# Altium PCB PCB1.PcbDoc
Units mm, origin at the board's own origin, x right, y up, seen from the top; angles counter-clockwise.
Board outline 102 x 101.6 mm, 2 copper layers (Top Layer, Bottom Layer); 110 components, 14 nets, 294 pads, 0 vias.
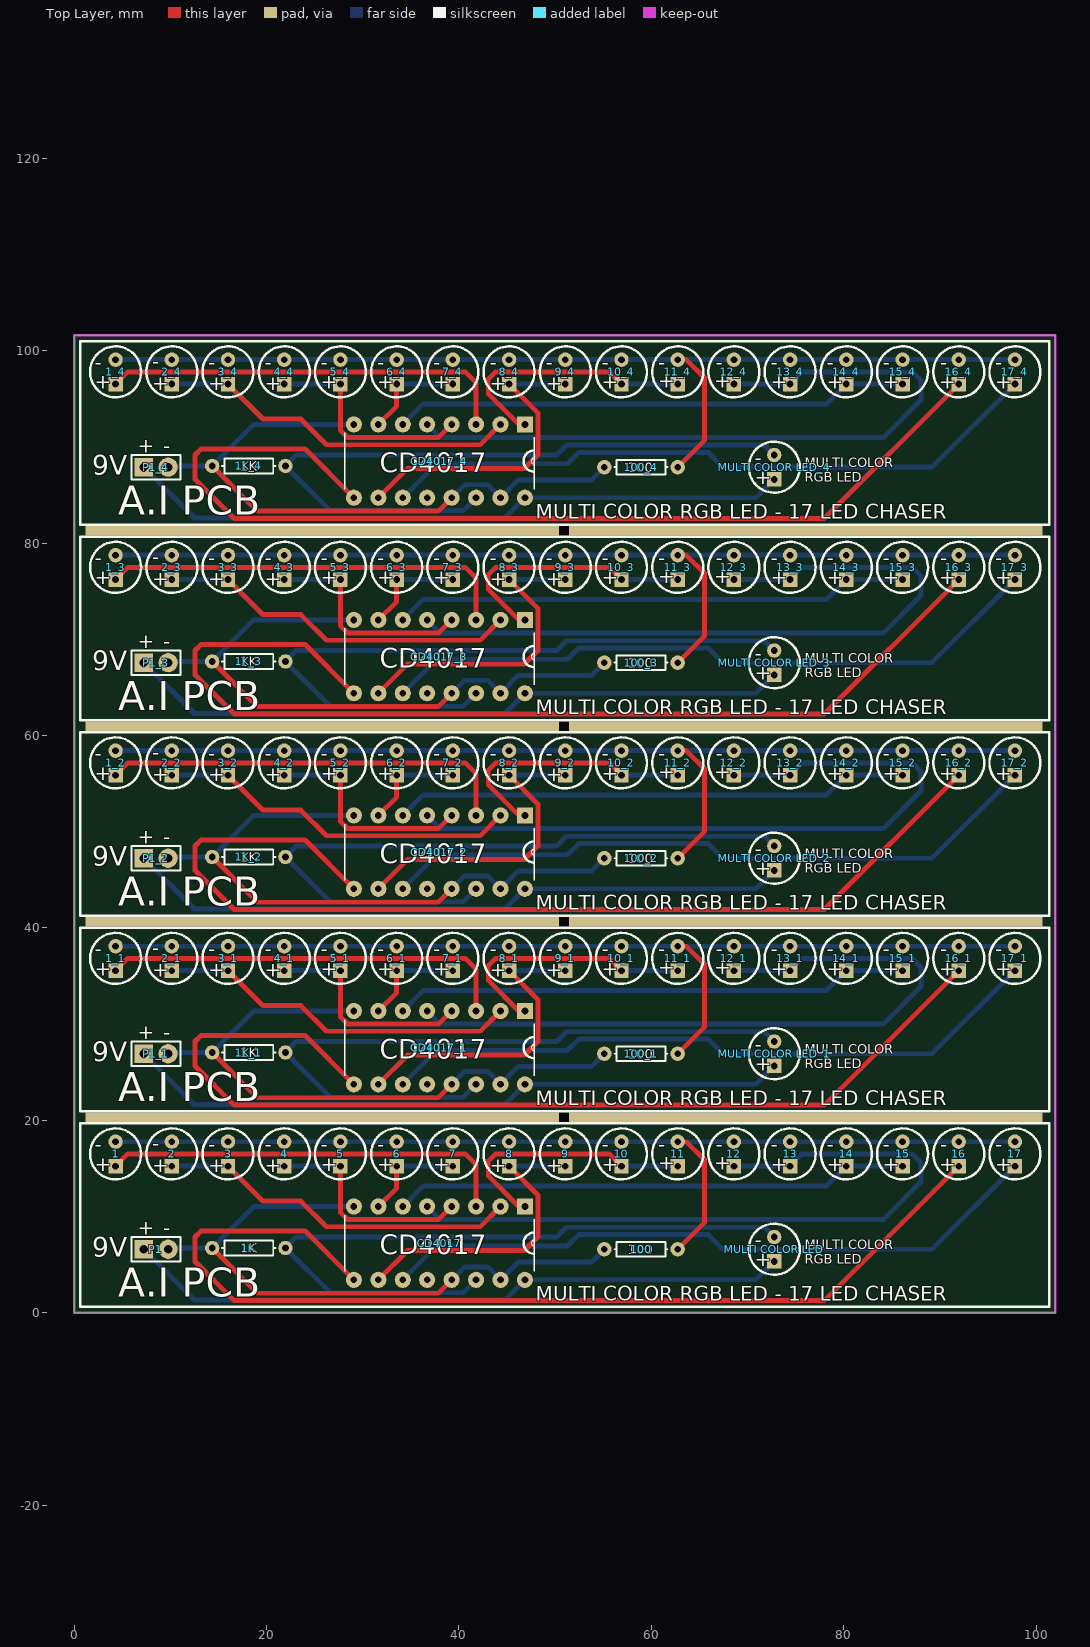
[diagram p0: Top Layer view]
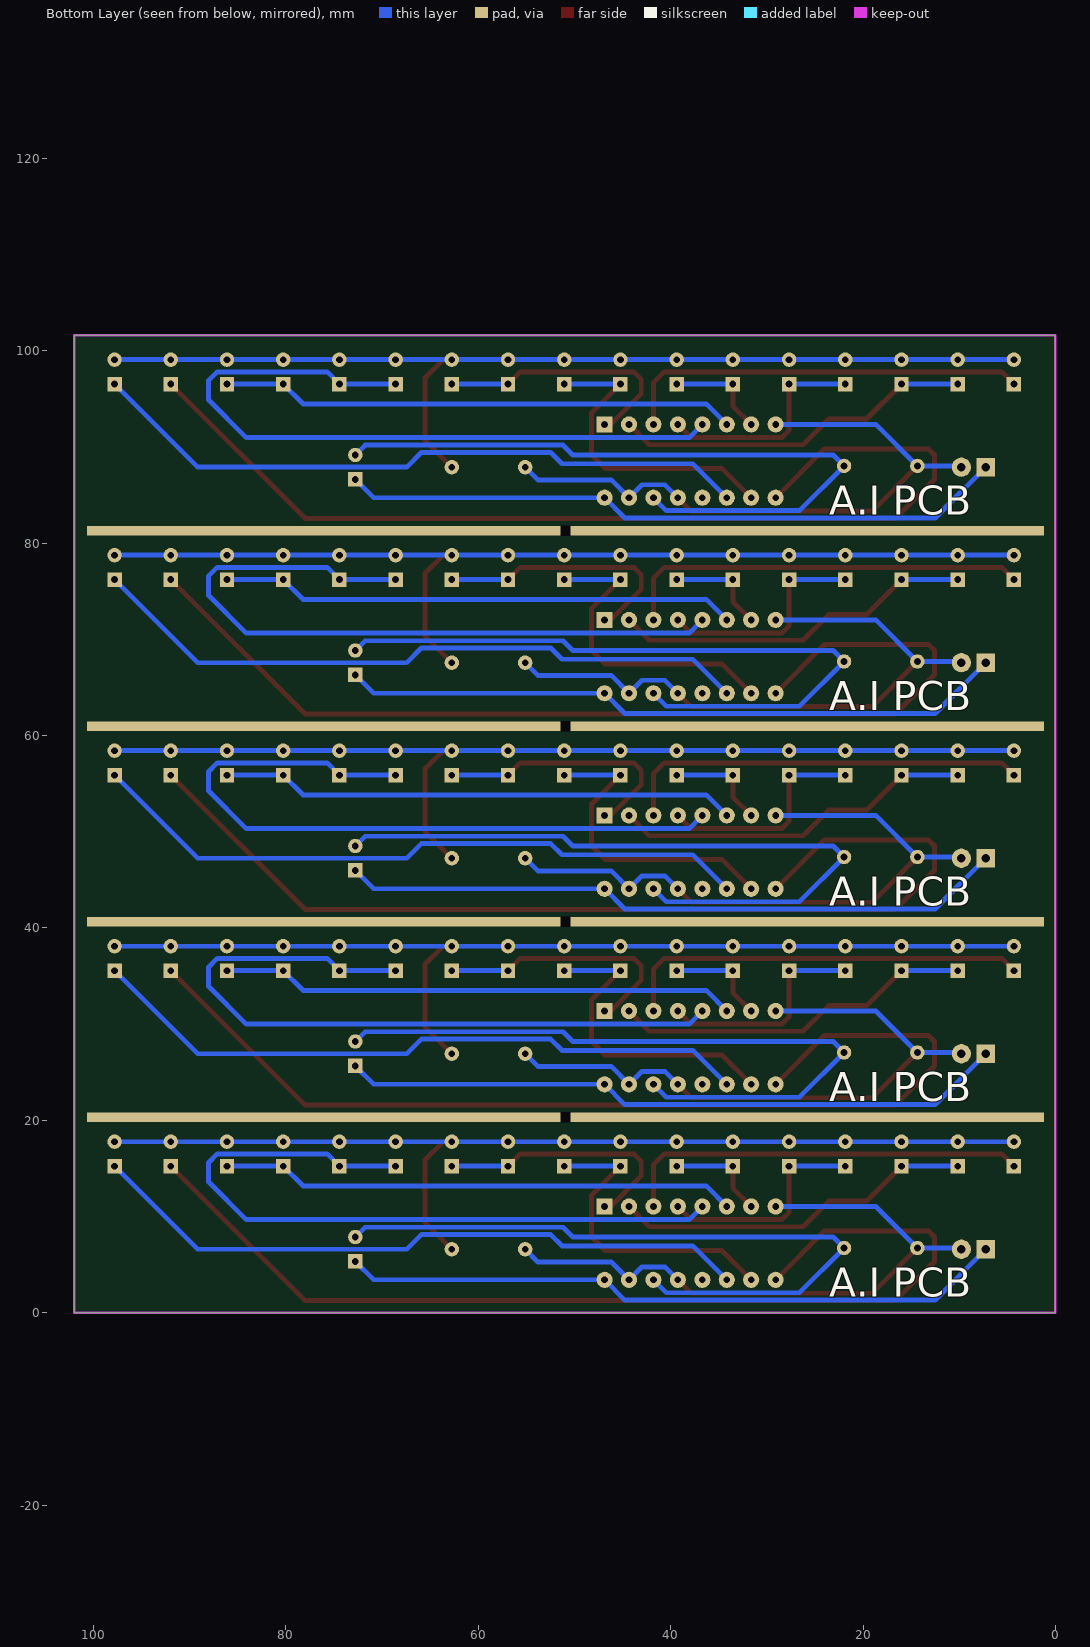
[diagram p1: Bottom Layer view, seen from below]

## Layer stack, top to bottom
Top Solder: solder mask 0.0102, Solder Resist, Dk 3.5
Top Layer: signal copper 0.0356
Dielectric 1: dielectric 0.32, FR-4, Dk 4.8
Bottom Layer: signal copper 0.0356
Bottom Solder: solder mask 0.0102, Solder Resist, Dk 3.5

## Board outline
0,0 0,101.6 102,101.6 102,0

## Design rules (kind name [scope] priority, off if disabled: settings)
Clearance [All] p1: gap=0.254 ignorepadtopadclearanceinfootprint=FALSE except(0: Arc-Hole Track-Hole SMDPad-Hole THPad-Hole Via-Hole Fill-Hole Poly-Hole Region-Hole Text-Hole)
PolygonConnect [All] p1: connectstyle=Relief reliefconductorwidth=0.254 reliefentries=4 polygonreliefangle="90 Angle" airgapwidth=0.254
RoutingVias [All] p1: holewidth=0.711 width=1.27 viastyle="Through Hole" minholewidth=0.711 minwidth=1.27 maxholewidth=0.711 maxwidth=1.27
SolderMaskExpansion [All] p1: expansion=0.102
Width [All] p1: maxlimit=0.762 minlimit=0.254 preferedwidth=0.508
30 further rules are at their usual default settings.

## Classes and differential pairs
component class Sheet1: 1 1K 2 3 4 5 6 7 8 9 10 11 12 13 14 15 16 17 100 CD4017 "MULTI COLOR LED" P1

## Components (designator, comment, footprint, x,y, rotation, side; value= is the part's Value field where it differs from the comment)
1 "L-53GD" L-53GD 4.318,16.51 r90 top
1_1 "L-53GD" L-53GD 4.318,36.83 r90 top (schematic designator 1)
1_2 "L-53GD" L-53GD 4.318,57.15 r90 top (schematic designator 1)
1_3 "L-53GD" L-53GD 4.318,77.47 r90 top (schematic designator 1)
1_4 "L-53GD" L-53GD 4.318,97.79 r90 top (schematic designator 1)
1K "Res1" AXIAL-0.3 18.161,6.731 r0 top value=1K
1K_1 "Res1" AXIAL-0.3 18.161,27.051 r0 top value=1K (schematic designator 1K)
1K_2 "Res1" AXIAL-0.3 18.161,47.371 r0 top value=1K (schematic designator 1K)
1K_3 "Res1" AXIAL-0.3 18.161,67.691 r0 top value=1K (schematic designator 1K)
1K_4 "Res1" AXIAL-0.3 18.161,88.011 r0 top value=1K (schematic designator 1K)
2 "L-53GD" L-53GD 10.16,16.51 r90 top
2_1 "L-53GD" L-53GD 10.16,36.83 r90 top (schematic designator 2)
2_2 "L-53GD" L-53GD 10.16,57.15 r90 top (schematic designator 2)
2_3 "L-53GD" L-53GD 10.16,77.47 r90 top (schematic designator 2)
2_4 "L-53GD" L-53GD 10.16,97.79 r90 top (schematic designator 2)
3 "L-53GD" L-53GD 16.002,16.51 r90 top
3_1 "L-53GD" L-53GD 16.002,36.83 r90 top (schematic designator 3)
3_2 "L-53GD" L-53GD 16.002,57.15 r90 top (schematic designator 3)
3_3 "L-53GD" L-53GD 16.002,77.47 r90 top (schematic designator 3)
3_4 "L-53GD" L-53GD 16.002,97.79 r90 top (schematic designator 3)
4 "L-53GD" L-53GD 21.844,16.51 r90 top
4_1 "L-53GD" L-53GD 21.844,36.83 r90 top (schematic designator 4)
4_2 "L-53GD" L-53GD 21.844,57.15 r90 top (schematic designator 4)
4_3 "L-53GD" L-53GD 21.844,77.47 r90 top (schematic designator 4)
4_4 "L-53GD" L-53GD 21.844,97.79 r90 top (schematic designator 4)
5 "L-53GD" L-53GD 27.686,16.51 r90 top
5_1 "L-53GD" L-53GD 27.686,36.83 r90 top (schematic designator 5)
5_2 "L-53GD" L-53GD 27.686,57.15 r90 top (schematic designator 5)
5_3 "L-53GD" L-53GD 27.686,77.47 r90 top (schematic designator 5)
5_4 "L-53GD" L-53GD 27.686,97.79 r90 top (schematic designator 5)
6 "L-53GD" L-53GD 33.528,16.51 r90 top
6_1 "L-53GD" L-53GD 33.528,36.83 r90 top (schematic designator 6)
6_2 "L-53GD" L-53GD 33.528,57.15 r90 top (schematic designator 6)
6_3 "L-53GD" L-53GD 33.528,77.47 r90 top (schematic designator 6)
6_4 "L-53GD" L-53GD 33.528,97.79 r90 top (schematic designator 6)
7 "L-53GD" L-53GD 39.37,16.51 r90 top
7_1 "L-53GD" L-53GD 39.37,36.83 r90 top (schematic designator 7)
7_2 "L-53GD" L-53GD 39.37,57.15 r90 top (schematic designator 7)
7_3 "L-53GD" L-53GD 39.37,77.47 r90 top (schematic designator 7)
7_4 "L-53GD" L-53GD 39.37,97.79 r90 top (schematic designator 7)
8 "L-53GD" L-53GD 45.212,16.51 r90 top
8_1 "L-53GD" L-53GD 45.212,36.83 r90 top (schematic designator 8)
8_2 "L-53GD" L-53GD 45.212,57.15 r90 top (schematic designator 8)
8_3 "L-53GD" L-53GD 45.212,77.47 r90 top (schematic designator 8)
8_4 "L-53GD" L-53GD 45.212,97.79 r90 top (schematic designator 8)
9 "L-53GD" L-53GD 51.054,16.51 r90 top
9_1 "L-53GD" L-53GD 51.054,36.83 r90 top (schematic designator 9)
9_2 "L-53GD" L-53GD 51.054,57.15 r90 top (schematic designator 9)
9_3 "L-53GD" L-53GD 51.054,77.47 r90 top (schematic designator 9)
9_4 "L-53GD" L-53GD 51.054,97.79 r90 top (schematic designator 9)
10 "L-53GD" L-53GD 56.896,16.51 r90 top
10_1 "L-53GD" L-53GD 56.896,36.83 r90 top (schematic designator 10)
10_2 "L-53GD" L-53GD 56.896,57.15 r90 top (schematic designator 10)
10_3 "L-53GD" L-53GD 56.896,77.47 r90 top (schematic designator 10)
10_4 "L-53GD" L-53GD 56.896,97.79 r90 top (schematic designator 10)
11 "L-53GD" L-53GD 62.738,16.51 r90 top
11_1 "L-53GD" L-53GD 62.738,36.83 r90 top (schematic designator 11)
11_2 "L-53GD" L-53GD 62.738,57.15 r90 top (schematic designator 11)
11_3 "L-53GD" L-53GD 62.738,77.47 r90 top (schematic designator 11)
11_4 "L-53GD" L-53GD 62.738,97.79 r90 top (schematic designator 11)
12 "L-53GD" L-53GD 68.58,16.51 r90 top
12_1 "L-53GD" L-53GD 68.58,36.83 r90 top (schematic designator 12)
12_2 "L-53GD" L-53GD 68.58,57.15 r90 top (schematic designator 12)
12_3 "L-53GD" L-53GD 68.58,77.47 r90 top (schematic designator 12)
12_4 "L-53GD" L-53GD 68.58,97.79 r90 top (schematic designator 12)
13 "L-53GD" L-53GD 74.422,16.51 r90 top
13_1 "L-53GD" L-53GD 74.422,36.83 r90 top (schematic designator 13)
13_2 "L-53GD" L-53GD 74.422,57.15 r90 top (schematic designator 13)
13_3 "L-53GD" L-53GD 74.422,77.47 r90 top (schematic designator 13)
13_4 "L-53GD" L-53GD 74.422,97.79 r90 top (schematic designator 13)
14 "L-53GD" L-53GD 80.264,16.51 r90 top
14_1 "L-53GD" L-53GD 80.264,36.83 r90 top (schematic designator 14)
14_2 "L-53GD" L-53GD 80.264,57.15 r90 top (schematic designator 14)
14_3 "L-53GD" L-53GD 80.264,77.47 r90 top (schematic designator 14)
14_4 "L-53GD" L-53GD 80.264,97.79 r90 top (schematic designator 14)
15 "L-53GD" L-53GD 86.106,16.51 r90 top
15_1 "L-53GD" L-53GD 86.106,36.83 r90 top (schematic designator 15)
15_2 "L-53GD" L-53GD 86.106,57.15 r90 top (schematic designator 15)
15_3 "L-53GD" L-53GD 86.106,77.47 r90 top (schematic designator 15)
15_4 "L-53GD" L-53GD 86.106,97.79 r90 top (schematic designator 15)
16 "L-53GD" L-53GD 91.948,16.51 r90 top
16_1 "L-53GD" L-53GD 91.948,36.83 r90 top (schematic designator 16)
16_2 "L-53GD" L-53GD 91.948,57.15 r90 top (schematic designator 16)
16_3 "L-53GD" L-53GD 91.948,77.47 r90 top (schematic designator 16)
16_4 "L-53GD" L-53GD 91.948,97.79 r90 top (schematic designator 16)
17 "L-53GD" L-53GD 97.79,16.51 r90 top
17_1 "L-53GD" L-53GD 97.79,36.83 r90 top (schematic designator 17)
17_2 "L-53GD" L-53GD 97.79,57.15 r90 top (schematic designator 17)
17_3 "L-53GD" L-53GD 97.79,77.47 r90 top (schematic designator 17)
17_4 "L-53GD" L-53GD 97.79,97.79 r90 top (schematic designator 17)
100 "Res1" AXIAL-0.3 58.928,6.604 r0 top value=1K
100_1 "Res1" AXIAL-0.3 58.928,26.924 r0 top value=1K (schematic designator 100)
100_2 "Res1" AXIAL-0.3 58.928,47.244 r0 top value=1K (schematic designator 100)
100_3 "Res1" AXIAL-0.3 58.928,67.564 r0 top value=1K (schematic designator 100)
100_4 "Res1" AXIAL-0.3 58.928,87.884 r0 top value=1K (schematic designator 100)
CD4017 "CD4017BE" *DIP254P762X508-16 29.083,3.429 r270 top
CD4017_1 "CD4017BE" *DIP254P762X508-16 29.083,23.749 r270 top (schematic designator CD4017)
CD4017_2 "CD4017BE" *DIP254P762X508-16 29.083,44.069 r270 top (schematic designator CD4017)
CD4017_3 "CD4017BE" *DIP254P762X508-16 29.083,64.389 r270 top (schematic designator CD4017)
CD4017_4 "CD4017BE" *DIP254P762X508-16 29.083,84.709 r270 top (schematic designator CD4017)
"MULTI COLOR LED" "L-53GD" L-53GD 72.771,6.604 r90 top
"MULTI COLOR LED_1" "L-53GD" L-53GD 72.771,26.924 r90 top (schematic designator "MULTI COLOR LED")
"MULTI COLOR LED_2" "L-53GD" L-53GD 72.771,47.244 r90 top (schematic designator "MULTI COLOR LED")
"MULTI COLOR LED_3" "L-53GD" L-53GD 72.771,67.564 r90 top (schematic designator "MULTI COLOR LED")
"MULTI COLOR LED_4" "L-53GD" L-53GD 72.771,87.884 r90 top (schematic designator "MULTI COLOR LED")
P1 "Header 2" HDR1X2 7.239,6.604 r0 top
P1_1 "Header 2" HDR1X2 7.239,26.924 r0 top (schematic designator P1)
P1_2 "Header 2" HDR1X2 7.239,47.244 r0 top (schematic designator P1)
P1_3 "Header 2" HDR1X2 7.239,67.564 r0 top (schematic designator P1)
P1_4 "Header 2" HDR1X2 7.239,87.884 r0 top (schematic designator P1)

## Footprints (in the part's own frame and the unit in brackets; to place one, negate y for a bottom-side part, rotate by r counter-clockwise, add the part's x,y. Pads: shape width x height; smd on the part's side, far side on the other; paste and mask are expansions set on the pad)
*DIP254P762X508-16 [mil]
  rect 66x66 hole 27.56: 1(-300,700)
  round 66 hole 27.56: 2(-300,600) 3(-300,500) 4(-300,400) 5(-300,300) 6(-300,200) 8(-300,0) 9(0,0) 10(0,100) 11(0,200) 12(0,300) 13(0,400) 14(0,500) 15(0,600) 16(0,700)
  oval 65.98x66 hole 27.56: 7(-300,100)
  silkscreen extent -265,-38 -35,738
AXIAL-0.3 [mm] "Axial Device, Thru-Hole; 2 Leads; 0.3 in Pin Spacing"
  round 1.5 hole 0.7: 1(-3.81,0) 2(3.81,0)
  silkscreen extent -2.77,-0.76 2.77,0.76
HDR1X2 [mm] "Connector; Header; 2 Position"
  rect 1.9x1.9 hole 0.9: 1(0,0)
  round 2 hole 0.9: 2(2.54,0)
  silkscreen extent -1.27,-1.27 3.81,1.27
L-53GD [mm]
  rect 1.5x1.5 hole 0.7: 1(-1.27,0)
  round 1.5 hole 0.7: 2(1.27,0)
  silkscreen extent -2.65,-2.65 2.65,2.65

## Part data
1 1_1 1_2 1_3 1_4 2 2_1 2_2 2_3 2_4 3 3_1 3_2 3_3 3_4 4 4_1 4_2 4_3 4_4 5 5_1 5_2 5_3 5_4 6 6_1 6_2 6_3 6_4 7 7_1 7_2 7_3 7_4 8 8_1 8_2 8_3 8_4 9 9_1 9_2 9_3 9_4 10 10_1 10_2 10_3 10_4 11 11_1 11_2 11_3 11_4 12 12_1 12_2 12_3 12_4 13 13_1 13_2 13_3 13_4 14 14_1 14_2 14_3 14_4 15 15_1 15_2 15_3 15_4 16 16_1 16_2 16_3 16_4 17 17_1 17_2 17_3 17_4 "MULTI COLOR LED" "MULTI COLOR LED_1" "MULTI COLOR LED_2" "MULTI COLOR LED_3" "MULTI COLOR LED_4": "LED", Manufacturer_Name=Kingbright, Mouser Part Number=N/A, RS Part Number=2286004A, Allied_Number=70424261, Allied Price/Stock=http://www.alliedelec.com/kingbright-l-53gd/70424261/, Datasheet Link=http://docs-emea.rs-online.com/webdocs/151e/0900766b8151e408.pdf, Manufacturer_Part_Number=L-53GD, Mouser Price/Stock=https://www.mouser.com/Search/Refine.aspx?Keyword=N%2FA, RS Price/Stock=http://uk.rs-online.com/web/p/products/2286004A
1K 1K_1 1K_2 1K_3 1K_4 100 100_1 100_2 100_3 100_4: "Resistor", LatestRevisionDate=17-Jul-2002, LatestRevisionNote="Re-released for DXP Platform.", PackageDescription="Axial Device, Thru-Hole; 2 Leads; 0.3 in Pin Spacing", PackageReference=AXIAL-0.3, Published=8-Jun-2000, Publisher="Altium Limited"
CD4017 CD4017_1 CD4017_2 CD4017_3 CD4017_4: "IC Mos 4017/CD4017BE HARRIS", Package="DIP-16 Intersil", Availability=Unavailable, MF=Texas, MP=CD4017BE, Price=None, SnapEDA_Link=https://www.snapeda.com/parts/CD4017BE/Texas%20Instruments/view-part/?ref=snap
P1 P1_1 P1_2 P1_3 P1_4: "Header, 2-Pin", LatestRevisionDate=17-Jul-2002, LatestRevisionNote="Re-released for DXP Platform.", Publisher="Altium Limited"

## Free pads (board coordinates)
  rect 99.5x1 hole 1 square: 10(50.927,20.32) 10(50.927,40.64) 10(50.927,60.96) 10(50.927,81.28)

## Nets (pads, with @x,y where several pads share a name; then routed paths per layer and width w, separated by ;. In a path a pad name is that pad's centre, name@x,y a point inside that pad or via, vN(x,y) a via of type N, cw(c..) or ccw(c..) an arc to the next point about the centre after c; other vN are vias at no path point)
Net1_1: 1.1 CD4017.3 | length 42.8
  Top Layer w0.508: 1.1 5.588,16.51 40.64,16.51 41.783,15.367 CD4017.3
Net1_2: 1.2 2.2 3.2 4.2 5.2 6.2 7.2 8.2 9.2 10.2 11.2 12.2 13.2 14.2 15.2 16.2 17.2 100.2 | length 107.5
  Top Layer w0.508: 100.2 65.532,9.398 65.532,15.875 63.627,17.78 11.2
  Bottom Layer w0.508: 1.2 2.2 3.2 4.2 5.2 6.2 7.2 8.2 9.2 10.2 11.2 12.2 13.2 14.2 15.2 16.2 17.2
Net1K_1: 1K.1 100.1 CD4017.8 CD4017.13 CD4017.15 P1.2 | length 66.9
  Top Layer w0.508: 1K.1 19.05,2.032 37.846,2.032 CD4017.13
  Bottom Layer w0.508: P1.2 9.906,6.731 1K.1 18.669,11.049 CD4017.8 ; CD4017.13 40.589,4.775 42.977,4.775 CD4017.15 46.177,5.283 53.797,5.283 100.1
Net1K_2: 1K.2 "MULTI COLOR LED.2" CD4017.14 | length 74.4
  Bottom Layer w0.508: CD4017.14 40.437,2.083 26.619,2.083 1K.2 23.114,7.874 50.165,7.874 51.181,8.89 71.755,8.89 72.771,7.874
Net2_1: 2.1 3.1 CD4017.2 | length 37.6
  Top Layer w0.508: 3.1 19.634,11.608 23.571,11.608 26.238,8.941 42.215,8.941 CD4017.2
  Bottom Layer w0.508: 2.1 3.1
Net4_1: 4.1 5.1 CD4017.4 | length 23.1
  Top Layer w0.508: 5.1 27.686,10.439 28.423,9.703 37.897,9.703 CD4017.4
  Bottom Layer w0.508: 4.1 5.1
Net6_1: 6.1 7.1 CD4017.7 | length 10.8
  Top Layer w0.508: CD4017.7 33.528,12.954 6.1
  Bottom Layer w0.508: 6.1 7.1
Net8_1: 8.1 9.1 CD4017.10 | length 32.9
  Top Layer w0.508: CD4017.10 34.671,6.477 46.812,6.477 48.209,7.874 48.209,12.243 8.1
  Bottom Layer w0.508: 8.1 9.1
Net10_1: 10.1 11.1 CD4017.1 | length 27.2
  Top Layer w0.508: CD4017.1 46.228,11.049 43.053,14.224 43.053,15.748 43.815,16.51 55.626,16.51 10.1
  Bottom Layer w0.508: 10.1 11.1
Net12_1: 12.1 13.1 CD4017.5 | length 75.9
  Bottom Layer w0.508: CD4017.5 38.075,9.677 84.099,9.677 88.011,13.589 88.011,15.621 87.122,16.51 75.692,16.51 13.1 12.1
Net14_1: 14.1 15.1 CD4017.6 | length 53.7
  Bottom Layer w0.508: CD4017.6 36.297,13.183 78.207,13.183 14.1 15.1
Net16_1: 16.1 CD4017.9 | length 108.3
  Top Layer w0.508: CD4017.9 24.003,8.509 13.208,8.509 12.573,7.874 12.573,5.334 16.637,1.27 77.978,1.27 16.1
Net17_1: 17.1 CD4017.11 | length 69.8
  Bottom Layer w0.508: CD4017.11 37.694,6.96 51.283,6.96 52.451,8.128 65.913,8.128 67.437,6.604 89.154,6.604 17.1
NetCD4017_16: "MULTI COLOR LED.1" CD4017.16 P1.1 | length 69.4
  Bottom Layer w0.508: P1.1 12.522,1.321 44.755,1.321 CD4017.16 70.866,3.429 72.771,5.334
pads on no net: 1_1.1 1_1.2 1_2.1 1_2.2 1_3.1 1_3.2 1_4.1 1_4.2 1K_1.1 1K_1.2 1K_2.1 1K_2.2 1K_3.1 1K_3.2 1K_4.1 1K_4.2 2_1.1 2_1.2 2_2.1 2_2.2 2_3.1 2_3.2 2_4.1 2_4.2 3_1.1 3_1.2 3_2.1 3_2.2 3_3.1 3_3.2 3_4.1 3_4.2 4_1.1 4_1.2 4_2.1 4_2.2 4_3.1 4_3.2 4_4.1 4_4.2 5_1.1 5_1.2 5_2.1 5_2.2 5_3.1 5_3.2 5_4.1 5_4.2 6_1.1 6_1.2 6_2.1 6_2.2 6_3.1 6_3.2 6_4.1 6_4.2 7_1.1 7_1.2 7_2.1 7_2.2 7_3.1 7_3.2 7_4.1 7_4.2 8_1.1 8_1.2 8_2.1 8_2.2 8_3.1 8_3.2 8_4.1 8_4.2 9_1.1 9_1.2 9_2.1 9_2.2 9_3.1 9_3.2 9_4.1 9_4.2 10_1.1 10_1.2 10_2.1 10_2.2 10_3.1 10_3.2 10_4.1 10_4.2 11_1.1 11_1.2 11_2.1 11_2.2 11_3.1 11_3.2 11_4.1 11_4.2 12_1.1 12_1.2 12_2.1 12_2.2 12_3.1 12_3.2 12_4.1 12_4.2 13_1.1 13_1.2 13_2.1 13_2.2 13_3.1 13_3.2 13_4.1 13_4.2 14_1.1 14_1.2 14_2.1 14_2.2 14_3.1 14_3.2 14_4.1 14_4.2 15_1.1 15_1.2 15_2.1 15_2.2 15_3.1 15_3.2 15_4.1 15_4.2 16_1.1 16_1.2 16_2.1 16_2.2 16_3.1 16_3.2 16_4.1 16_4.2 17_1.1 17_1.2 17_2.1 17_2.2 17_3.1 17_3.2 17_4.1 17_4.2 100_1.1 100_1.2 100_2.1 100_2.2 100_3.1 100_3.2 100_4.1 100_4.2 "MULTI COLOR LED_1.1" "MULTI COLOR LED_1.2" "MULTI COLOR LED_2.1" "MULTI COLOR LED_2.2" "MULTI COLOR LED_3.1" "MULTI COLOR LED_3.2" "MULTI COLOR LED_4.1" "MULTI COLOR LED_4.2" CD4017.12 CD4017_1.1 CD4017_1.2 CD4017_1.3 CD4017_1.4 CD4017_1.5 CD4017_1.6 CD4017_1.7 CD4017_1.8 CD4017_1.9 CD4017_1.10 CD4017_1.11 CD4017_1.12 CD4017_1.13 CD4017_1.14 CD4017_1.15 CD4017_1.16 CD4017_2.1 CD4017_2.2 CD4017_2.3 CD4017_2.4 CD4017_2.5 CD4017_2.6 CD4017_2.7 CD4017_2.8 CD4017_2.9 CD4017_2.10 CD4017_2.11 CD4017_2.12 CD4017_2.13 CD4017_2.14 CD4017_2.15 CD4017_2.16 CD4017_3.1 CD4017_3.2 CD4017_3.3 CD4017_3.4 CD4017_3.5 CD4017_3.6 CD4017_3.7 CD4017_3.8 CD4017_3.9 CD4017_3.10 CD4017_3.11 CD4017_3.12 CD4017_3.13 CD4017_3.14 CD4017_3.15 CD4017_3.16 CD4017_4.1 CD4017_4.2 CD4017_4.3 CD4017_4.4 CD4017_4.5 CD4017_4.6 CD4017_4.7 CD4017_4.8 CD4017_4.9 CD4017_4.10 CD4017_4.11 CD4017_4.12 CD4017_4.13 CD4017_4.14 CD4017_4.15 CD4017_4.16 P1_1.1 P1_1.2 P1_2.1 P1_2.2 P1_3.1 P1_3.2 P1_4.1 P1_4.2
copper on no net: | length 3200.3
  Top Layer w0.508: 4.318,35.56 5.588,36.83 40.64,36.83 41.783,35.687 41.783,31.369 ; 4.318,55.88 5.588,57.15 40.64,57.15 41.783,56.007 41.783,51.689 ; 4.318,76.2 5.588,77.47 40.64,77.47 41.783,76.327 41.783,72.009 ; 4.318,96.52 5.588,97.79 40.64,97.79 41.783,96.647 41.783,92.329 ; 14.351,27.051 19.05,22.352 37.846,22.352 39.243,23.749 ; 14.351,47.371 19.05,42.672 37.846,42.672 39.243,44.069 ; 14.351,67.691 19.05,62.992 37.846,62.992 39.243,64.389 ; 14.351,88.011 19.05,83.312 37.846,83.312 39.243,84.709 ; 16.002,35.56 19.634,31.928 23.571,31.928 26.238,29.261 42.215,29.261 44.323,31.369 ; 16.002,55.88 19.634,52.248 23.571,52.248 26.238,49.581 42.215,49.581 44.323,51.689 ; 16.002,76.2 19.634,72.568 23.571,72.568 26.238,69.901 42.215,69.901 44.323,72.009 ; 16.002,96.52 19.634,92.888 23.571,92.888 26.238,90.221 42.215,90.221 44.323,92.329 ; 27.686,35.56 27.686,30.759 28.423,30.023 37.897,30.023 39.243,31.369 ; 27.686,55.88 27.686,51.079 28.423,50.343 37.897,50.343 39.243,51.689 ; 27.686,76.2 27.686,71.399 28.423,70.663 37.897,70.663 39.243,72.009 ; 27.686,96.52 27.686,91.719 28.423,90.983 37.897,90.983 39.243,92.329 ; 29.083,23.749 24.003,28.829 13.208,28.829 12.573,28.194 12.573,25.654 16.637,21.59 77.978,21.59 91.948,35.56 ; 29.083,44.069 24.003,49.149 13.208,49.149 12.573,48.514 12.573,45.974 16.637,41.91 77.978,41.91 91.948,55.88 ; 29.083,64.389 24.003,69.469 13.208,69.469 12.573,68.834 12.573,66.294 16.637,62.23 77.978,62.23 91.948,76.2 ; 29.083,84.709 24.003,89.789 13.208,89.789 12.573,89.154 12.573,86.614 16.637,82.55 77.978,82.55 91.948,96.52 ; 31.623,23.749 34.671,26.797 46.812,26.797 48.209,28.194 48.209,32.563 45.212,35.56 ; 31.623,31.369 33.528,33.274 33.528,35.56 ; 31.623,44.069 34.671,47.117 46.812,47.117 48.209,48.514 48.209,52.883 45.212,55.88 ; 31.623,51.689 33.528,53.594 33.528,55.88 ; 31.623,64.389 34.671,67.437 46.812,67.437 48.209,68.834 48.209,73.203 45.212,76.2 ; 31.623,72.009 33.528,73.914 33.528,76.2 ; 31.623,84.709 34.671,87.757 46.812,87.757 48.209,89.154 48.209,93.523 45.212,96.52 ; 31.623,92.329 33.528,94.234 33.528,96.52 ; 46.863,31.369 46.228,31.369 43.053,34.544 43.053,36.068 43.815,36.83 55.626,36.83 56.896,35.56 ; 46.863,51.689 46.228,51.689 43.053,54.864 43.053,56.388 43.815,57.15 55.626,57.15 56.896,55.88 ; 46.863,72.009 46.228,72.009 43.053,75.184 43.053,76.708 43.815,77.47 55.626,77.47 56.896,76.2 ; 46.863,92.329 46.228,92.329 43.053,95.504 43.053,97.028 43.815,97.79 55.626,97.79 56.896,96.52 ; 62.738,26.924 65.532,29.718 65.532,36.195 63.627,38.1 62.738,38.1 ; 62.738,47.244 65.532,50.038 65.532,56.515 63.627,58.42 62.738,58.42 ; 62.738,67.564 65.532,70.358 65.532,76.835 63.627,78.74 62.738,78.74 ; 62.738,87.884 65.532,90.678 65.532,97.155 63.627,99.06 62.738,99.06
  Bottom Layer w0.508: 4.318,38.1 10.16,38.1 16.002,38.1 21.844,38.1 27.686,38.1 33.528,38.1 39.37,38.1 45.212,38.1 51.054,38.1 56.896,38.1 62.738,38.1 68.58,38.1 74.422,38.1 80.264,38.1 86.106,38.1 91.948,38.1 97.79,38.1 ; 4.318,58.42 10.16,58.42 16.002,58.42 21.844,58.42 27.686,58.42 33.528,58.42 39.37,58.42 45.212,58.42 51.054,58.42 56.896,58.42 62.738,58.42 68.58,58.42 74.422,58.42 80.264,58.42 86.106,58.42 91.948,58.42 97.79,58.42 ; 4.318,78.74 10.16,78.74 16.002,78.74 21.844,78.74 27.686,78.74 33.528,78.74 39.37,78.74 45.212,78.74 51.054,78.74 56.896,78.74 62.738,78.74 68.58,78.74 74.422,78.74 80.264,78.74 86.106,78.74 91.948,78.74 97.79,78.74 ; 4.318,99.06 10.16,99.06 16.002,99.06 21.844,99.06 27.686,99.06 33.528,99.06 39.37,99.06 45.212,99.06 51.054,99.06 56.896,99.06 62.738,99.06 68.58,99.06 74.422,99.06 80.264,99.06 86.106,99.06 91.948,99.06 97.79,99.06 ; 7.239,26.924 12.522,21.641 44.755,21.641 46.863,23.749 70.866,23.749 72.771,25.654 ; 7.239,47.244 12.522,41.961 44.755,41.961 46.863,44.069 70.866,44.069 72.771,45.974 ; 7.239,67.564 12.522,62.281 44.755,62.281 46.863,64.389 70.866,64.389 72.771,66.294 ; 7.239,87.884 12.522,82.601 44.755,82.601 46.863,84.709 70.866,84.709 72.771,86.614 ; 9.779,26.924 9.906,27.051 14.351,27.051 18.669,31.369 29.083,31.369 ; 9.779,47.244 9.906,47.371 14.351,47.371 18.669,51.689 29.083,51.689 ; 9.779,67.564 9.906,67.691 14.351,67.691 18.669,72.009 29.083,72.009 ; 9.779,87.884 9.906,88.011 14.351,88.011 18.669,92.329 29.083,92.329 ; 10.16,35.56 16.002,35.56 ; 10.16,55.88 16.002,55.88 ; 10.16,76.2 16.002,76.2 ; 10.16,96.52 16.002,96.52 ; 21.844,35.56 27.686,35.56 ; 21.844,55.88 27.686,55.88 ; 21.844,76.2 27.686,76.2 ; 21.844,96.52 27.686,96.52 ; 33.528,35.56 39.37,35.56 ; 33.528,55.88 39.37,55.88 ; 33.528,76.2 39.37,76.2 ; 33.528,96.52 39.37,96.52 ; 34.163,23.749 37.694,27.28 51.283,27.28 52.451,28.448 65.913,28.448 67.437,26.924 89.154,26.924 97.79,35.56 ; 34.163,31.369 36.297,33.503 78.207,33.503 80.264,35.56 86.106,35.56 ; 34.163,44.069 37.694,47.6 51.283,47.6 52.451,48.768 65.913,48.768 67.437,47.244 89.154,47.244 97.79,55.88 ; 34.163,51.689 36.297,53.823 78.207,53.823 80.264,55.88 86.106,55.88 ; 34.163,64.389 37.694,67.92 51.283,67.92 52.451,69.088 65.913,69.088 67.437,67.564 89.154,67.564 97.79,76.2 ; 34.163,72.009 36.297,74.143 78.207,74.143 80.264,76.2 86.106,76.2 ; 34.163,84.709 37.694,88.24 51.283,88.24 52.451,89.408 65.913,89.408 67.437,87.884 89.154,87.884 97.79,96.52 ; 34.163,92.329 36.297,94.463 78.207,94.463 80.264,96.52 86.106,96.52 ; 36.703,31.369 38.075,29.997 84.099,29.997 88.011,33.909 88.011,35.941 87.122,36.83 75.692,36.83 74.422,35.56 68.58,35.56 ; 36.703,51.689 38.075,50.317 84.099,50.317 88.011,54.229 88.011,56.261 87.122,57.15 75.692,57.15 74.422,55.88 68.58,55.88 ; 36.703,72.009 38.075,70.637 84.099,70.637 88.011,74.549 88.011,76.581 87.122,77.47 75.692,77.47 74.422,76.2 68.58,76.2 ; 36.703,92.329 38.075,90.957 84.099,90.957 88.011,94.869 88.011,96.901 87.122,97.79 75.692,97.79 74.422,96.52 68.58,96.52 ; 39.243,23.749 40.589,25.095 42.977,25.095 44.323,23.749 46.177,25.603 53.797,25.603 55.118,26.924 ; 39.243,44.069 40.589,45.415 42.977,45.415 44.323,44.069 46.177,45.923 53.797,45.923 55.118,47.244 ; 39.243,64.389 40.589,65.735 42.977,65.735 44.323,64.389 46.177,66.243 53.797,66.243 55.118,67.564 ; 39.243,84.709 40.589,86.055 42.977,86.055 44.323,84.709 46.177,86.563 53.797,86.563 55.118,87.884 ; 41.783,23.749 40.437,22.403 26.619,22.403 21.971,27.051 23.114,28.194 50.165,28.194 51.181,29.21 71.755,29.21 72.771,28.194 ; 41.783,44.069 40.437,42.723 26.619,42.723 21.971,47.371 23.114,48.514 50.165,48.514 51.181,49.53 71.755,49.53 72.771,48.514 ; 41.783,64.389 40.437,63.043 26.619,63.043 21.971,67.691 23.114,68.834 50.165,68.834 51.181,69.85 71.755,69.85 72.771,68.834 ; 41.783,84.709 40.437,83.363 26.619,83.363 21.971,88.011 23.114,89.154 50.165,89.154 51.181,90.17 71.755,90.17 72.771,89.154 ; 45.212,35.56 51.054,35.56 ; 45.212,55.88 51.054,55.88 ; 45.212,76.2 51.054,76.2 ; 45.212,96.52 51.054,96.52 ; 56.896,35.56 62.738,35.56 ; 56.896,55.88 62.738,55.88 ; 56.896,76.2 62.738,76.2 ; 56.896,96.52 62.738,96.52

## Keep-outs
Keep-Out Layer:
  the board outline again, w0.254

## Silkscreen, mask and mechanical layers (free items; w line width, h text height)
Top Overlay:
  lines w0.254: 47.755,6.137 cw(c47.828,7.239) 47.755,8.341 ; 47.755,26.457 cw(c47.828,27.559) 47.755,28.661 ; 47.755,46.777 cw(c47.828,47.879) 47.755,48.981 ; 47.755,67.097 cw(c47.828,68.199) 47.755,69.301 ; 47.755,87.417 cw(c47.828,88.519) 47.755,89.621 ; 0.635,0.635 101.346,0.635 101.346,19.685 0.635,19.685 0.635,0.635 ; 0.635,20.955 0.635,40.005 101.346,40.005 101.346,20.955 0.635,20.955 ; 0.635,41.275 0.635,60.325 101.346,60.325 101.346,41.275 0.635,41.275 ; 0.635,61.595 0.635,80.645 101.346,80.645 101.346,61.595 0.635,61.595 ; 0.635,81.915 0.635,100.965 101.346,100.965 101.346,81.915 0.635,81.915
  text "-" at 8.128,98.171 h1.52
  text "-" at 2.159,98.044 h1.52
  text "-" at 13.97,98.044 h1.52
  text "-" at 19.812,98.044 h1.52
  text "-" at 25.654,98.044 h1.52
  text "-" at 31.496,98.044 h1.52
  text "-" at 37.338,98.044 h1.52
  text "-" at 43.18,98.044 h1.52
  text "-" at 49.022,98.044 h1.52
  text "-" at 54.864,98.044 h1.52
  text "-" at 60.706,98.044 h1.52
  text "-" at 66.675,98.044 h1.52
  text "-" at 72.39,98.044 h1.52
  text "-" at 78.232,98.044 h1.52
  text "-" at 84.074,98.044 h1.52
  text "-" at 90.043,98.044 h1.52
  text "-" at 95.758,98.044 h1.52
  text "+" at 60.706,96.139 h1.52
  text "+" at 66.548,96.139 h1.52
  text "+" at 2.159,96.012 h1.52
  text "+" at 25.654,96.012 h1.52
  text "+" at 31.496,96.012 h1.52
  text "+" at 37.338,96.012 h1.52
  text "+" at 54.864,96.012 h1.52
  text "+" at 72.39,96.012 h1.52
  text "+" at 78.232,96.012 h1.52
  text "+" at 84.074,96.012 h1.52
  text "+" at 89.916,96.012 h1.52
  text "+" at 95.758,96.012 h1.52
  text "+" at 8.128,95.885 h1.52
  text "+" at 13.97,95.885 h1.52
  text "+" at 19.812,95.885 h1.52
  text "+" at 43.18,95.885 h1.52
  text "+" at 49.022,95.885 h1.52
  text "+" at 6.604,89.408 h1.52
  text "-" at 9.271,89.408 h1.52
  text "-" at 70.739,88.138 h1.52
  text "1K" at 17.272,87.503 h1
  text "CD4017" at 31.75,87.376 h2
  text "100" at 57.531,87.376 h1
  text "9V" at 1.905,87.122 h2
  text "MULTI COLOR / RGB LED" at 75.946,86.36 h1
  text "+" at 70.739,86.106 h1.52
  text "A.I PCB" at 4.572,82.931 h3
  text "MULTI COLOR RGB LED - 17 LED CHASER" at 48.006,82.55 h1.52
  text "-" at 8.128,77.851 h1.52
  text "-" at 2.159,77.724 h1.52
  text "-" at 13.97,77.724 h1.52
  text "-" at 19.812,77.724 h1.52
  text "-" at 25.654,77.724 h1.52
  text "-" at 31.496,77.724 h1.52
  text "-" at 37.338,77.724 h1.52
  text "-" at 43.18,77.724 h1.52
  text "-" at 49.022,77.724 h1.52
  text "-" at 54.864,77.724 h1.52
  text "-" at 60.706,77.724 h1.52
  text "-" at 66.675,77.724 h1.52
  text "-" at 72.39,77.724 h1.52
  text "-" at 78.232,77.724 h1.52
  text "-" at 84.074,77.724 h1.52
  text "-" at 90.043,77.724 h1.52
  text "-" at 95.758,77.724 h1.52
  text "+" at 60.706,75.819 h1.52
  text "+" at 66.548,75.819 h1.52
  text "+" at 2.159,75.692 h1.52
  text "+" at 25.654,75.692 h1.52
  text "+" at 31.496,75.692 h1.52
  text "+" at 37.338,75.692 h1.52
  text "+" at 54.864,75.692 h1.52
  text "+" at 72.39,75.692 h1.52
  text "+" at 78.232,75.692 h1.52
  text "+" at 84.074,75.692 h1.52
  text "+" at 89.916,75.692 h1.52
  text "+" at 95.758,75.692 h1.52
  text "+" at 8.128,75.565 h1.52
  text "+" at 13.97,75.565 h1.52
  text "+" at 19.812,75.565 h1.52
  text "+" at 43.18,75.565 h1.52
  text "+" at 49.022,75.565 h1.52
  text "+" at 6.604,69.088 h1.52
  text "-" at 9.271,69.088 h1.52
  text "-" at 70.739,67.818 h1.52
  text "1K" at 17.272,67.183 h1
  text "CD4017" at 31.75,67.056 h2
  text "100" at 57.531,67.056 h1
  text "9V" at 1.905,66.802 h2
  text "MULTI COLOR / RGB LED" at 75.946,66.04 h1
  text "+" at 70.739,65.786 h1.52
  text "A.I PCB" at 4.572,62.611 h3
  text "MULTI COLOR RGB LED - 17 LED CHASER" at 48.006,62.23 h1.52
  text "-" at 8.128,57.531 h1.52
  text "-" at 2.159,57.404 h1.52
  text "-" at 13.97,57.404 h1.52
  text "-" at 19.812,57.404 h1.52
  text "-" at 25.654,57.404 h1.52
  text "-" at 31.496,57.404 h1.52
  text "-" at 37.338,57.404 h1.52
  text "-" at 43.18,57.404 h1.52
  text "-" at 49.022,57.404 h1.52
  text "-" at 54.864,57.404 h1.52
  text "-" at 60.706,57.404 h1.52
  text "-" at 66.675,57.404 h1.52
  text "-" at 72.39,57.404 h1.52
  text "-" at 78.232,57.404 h1.52
  text "-" at 84.074,57.404 h1.52
  text "-" at 90.043,57.404 h1.52
  text "-" at 95.758,57.404 h1.52
  text "+" at 60.706,55.499 h1.52
  text "+" at 66.548,55.499 h1.52
  text "+" at 2.159,55.372 h1.52
  text "+" at 25.654,55.372 h1.52
  text "+" at 31.496,55.372 h1.52
  text "+" at 37.338,55.372 h1.52
  text "+" at 54.864,55.372 h1.52
  text "+" at 72.39,55.372 h1.52
  text "+" at 78.232,55.372 h1.52
  text "+" at 84.074,55.372 h1.52
  text "+" at 89.916,55.372 h1.52
  text "+" at 95.758,55.372 h1.52
  text "+" at 8.128,55.245 h1.52
  text "+" at 13.97,55.245 h1.52
  text "+" at 19.812,55.245 h1.52
  text "+" at 43.18,55.245 h1.52
  text "+" at 49.022,55.245 h1.52
  text "+" at 6.604,48.768 h1.52
  text "-" at 9.271,48.768 h1.52
  text "-" at 70.739,47.498 h1.52
  text "1K" at 17.272,46.863 h1
  text "CD4017" at 31.75,46.736 h2
  text "100" at 57.531,46.736 h1
  text "9V" at 1.905,46.482 h2
  text "MULTI COLOR / RGB LED" at 75.946,45.72 h1
  text "+" at 70.739,45.466 h1.52
  text "A.I PCB" at 4.572,42.291 h3
  text "MULTI COLOR RGB LED - 17 LED CHASER" at 48.006,41.91 h1.52
  text "-" at 8.128,37.211 h1.52
  text "-" at 2.159,37.084 h1.52
  text "-" at 13.97,37.084 h1.52
  text "-" at 19.812,37.084 h1.52
  text "-" at 25.654,37.084 h1.52
  text "-" at 31.496,37.084 h1.52
  text "-" at 37.338,37.084 h1.52
  text "-" at 43.18,37.084 h1.52
  text "-" at 49.022,37.084 h1.52
  text "-" at 54.864,37.084 h1.52
  text "-" at 60.706,37.084 h1.52
  text "-" at 66.675,37.084 h1.52
  text "-" at 72.39,37.084 h1.52
  text "-" at 78.232,37.084 h1.52
  text "-" at 84.074,37.084 h1.52
  text "-" at 90.043,37.084 h1.52
  text "-" at 95.758,37.084 h1.52
  text "+" at 60.706,35.179 h1.52
  text "+" at 66.548,35.179 h1.52
  text "+" at 2.159,35.052 h1.52
  text "+" at 25.654,35.052 h1.52
  text "+" at 31.496,35.052 h1.52
  text "+" at 37.338,35.052 h1.52
  text "+" at 54.864,35.052 h1.52
  text "+" at 72.39,35.052 h1.52
  text "+" at 78.232,35.052 h1.52
  text "+" at 84.074,35.052 h1.52
  text "+" at 89.916,35.052 h1.52
  text "+" at 95.758,35.052 h1.52
  text "+" at 8.128,34.925 h1.52
  text "+" at 13.97,34.925 h1.52
  text "+" at 19.812,34.925 h1.52
  text "+" at 43.18,34.925 h1.52
  text "+" at 49.022,34.925 h1.52
  text "+" at 6.604,28.448 h1.52
  text "-" at 9.271,28.448 h1.52
  text "-" at 70.739,27.178 h1.52
  text "1K" at 17.272,26.543 h1
  text "CD4017" at 31.75,26.416 h2
  text "100" at 57.531,26.416 h1
  text "9V" at 1.905,26.162 h2
  text "MULTI COLOR / RGB LED" at 75.946,25.4 h1
  text "+" at 70.739,25.146 h1.52
  text "A.I PCB" at 4.572,21.971 h3
  text "MULTI COLOR RGB LED - 17 LED CHASER" at 48.006,21.59 h1.52
  text "-" at 8.128,16.891 h1.52
  text "-" at 2.159,16.764 h1.52
  text "-" at 13.97,16.764 h1.52
  text "-" at 19.812,16.764 h1.52
  text "-" at 25.654,16.764 h1.52
  text "-" at 31.496,16.764 h1.52
  text "-" at 37.338,16.764 h1.52
  text "-" at 43.18,16.764 h1.52
  text "-" at 49.022,16.764 h1.52
  text "-" at 54.864,16.764 h1.52
  text "-" at 60.706,16.764 h1.52
  text "-" at 66.675,16.764 h1.52
  text "-" at 72.39,16.764 h1.52
  text "-" at 78.232,16.764 h1.52
  text "-" at 84.074,16.764 h1.52
  text "-" at 90.043,16.764 h1.52
  text "-" at 95.758,16.764 h1.52
  text "+" at 60.706,14.859 h1.52
  text "+" at 66.548,14.859 h1.52
  text "+" at 2.159,14.732 h1.52
  text "+" at 25.654,14.732 h1.52
  text "+" at 31.496,14.732 h1.52
  text "+" at 37.338,14.732 h1.52
  text "+" at 54.864,14.732 h1.52
  text "+" at 72.39,14.732 h1.52
  text "+" at 78.232,14.732 h1.52
  text "+" at 84.074,14.732 h1.52
  text "+" at 89.916,14.732 h1.52
  text "+" at 95.758,14.732 h1.52
  text "+" at 8.128,14.605 h1.52
  text "+" at 13.97,14.605 h1.52
  text "+" at 19.812,14.605 h1.52
  text "+" at 43.18,14.605 h1.52
  text "+" at 49.022,14.605 h1.52
  text "+" at 6.604,8.128 h1.52
  text "-" at 9.271,8.128 h1.52
  text "-" at 70.739,6.858 h1.52
  text "1K" at 17.272,6.223 h1
  text "CD4017" at 31.75,6.096 h2
  text "100" at 57.531,6.096 h1
  text "9V" at 1.905,5.842 h2
  text "MULTI COLOR / RGB LED" at 75.946,5.08 h1
  text "+" at 70.739,4.826 h1.52
  text "A.I PCB" at 4.572,1.651 h3
  text "MULTI COLOR RGB LED - 17 LED CHASER" at 48.006,1.27 h1.52
Bottom Overlay:
  text "A.I PCB" at 23.495,82.931 h3
  text "A.I PCB" at 23.495,62.611 h3
  text "A.I PCB" at 23.495,42.291 h3
  text "A.I PCB" at 23.495,21.971 h3
  text "A.I PCB" at 23.495,1.651 h3